# Altium PCB OpenMV Cam M7.PcbDoc
Units mil, origin at the board's own origin, x right, y up, seen from the top; angles counter-clockwise.
Board outline 1400 x 1750 mil, 4 copper layers (Top Layer, GND, VCC, Bottom Layer), stack 61.855 mil thick; 49 components, 68 nets, 293 pads, 153 vias.
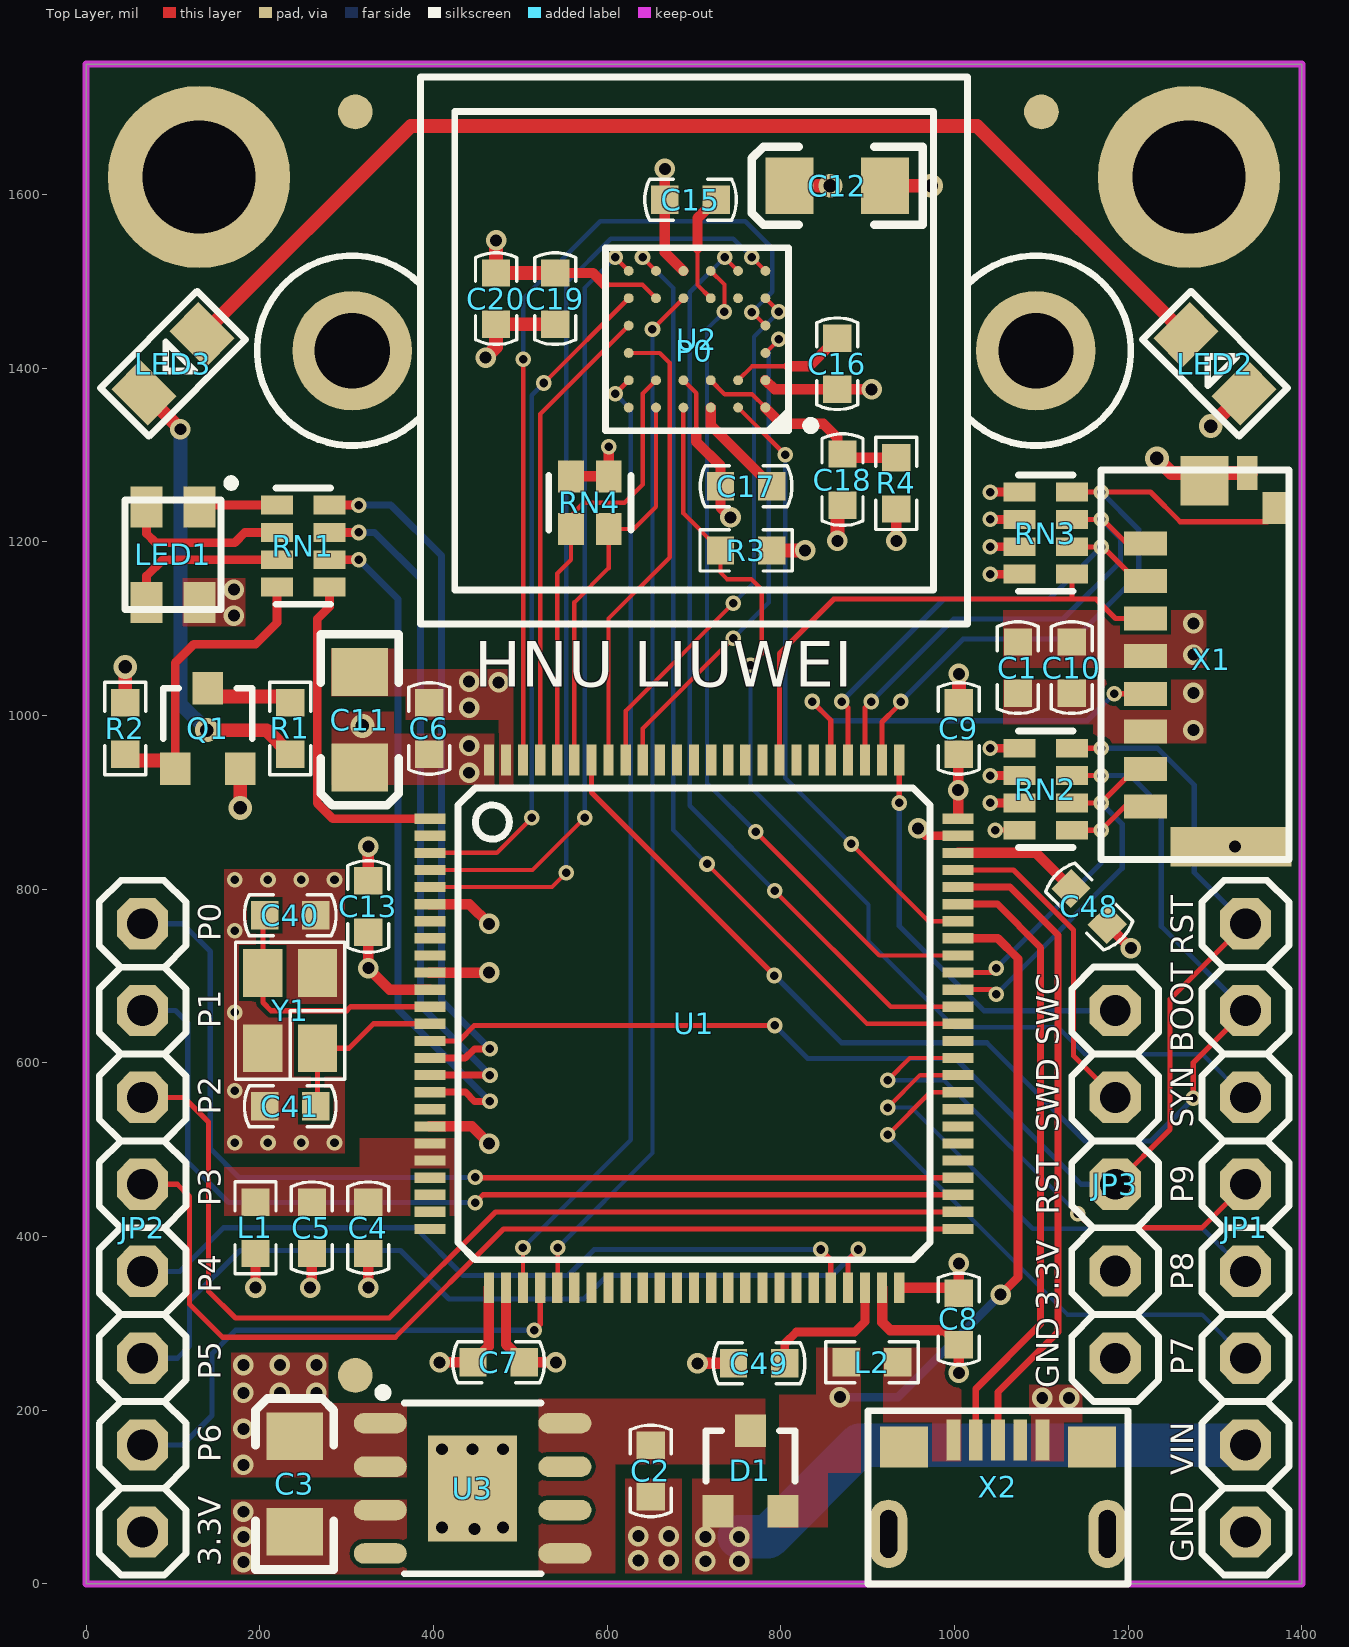
[diagram p0: Top Layer view]
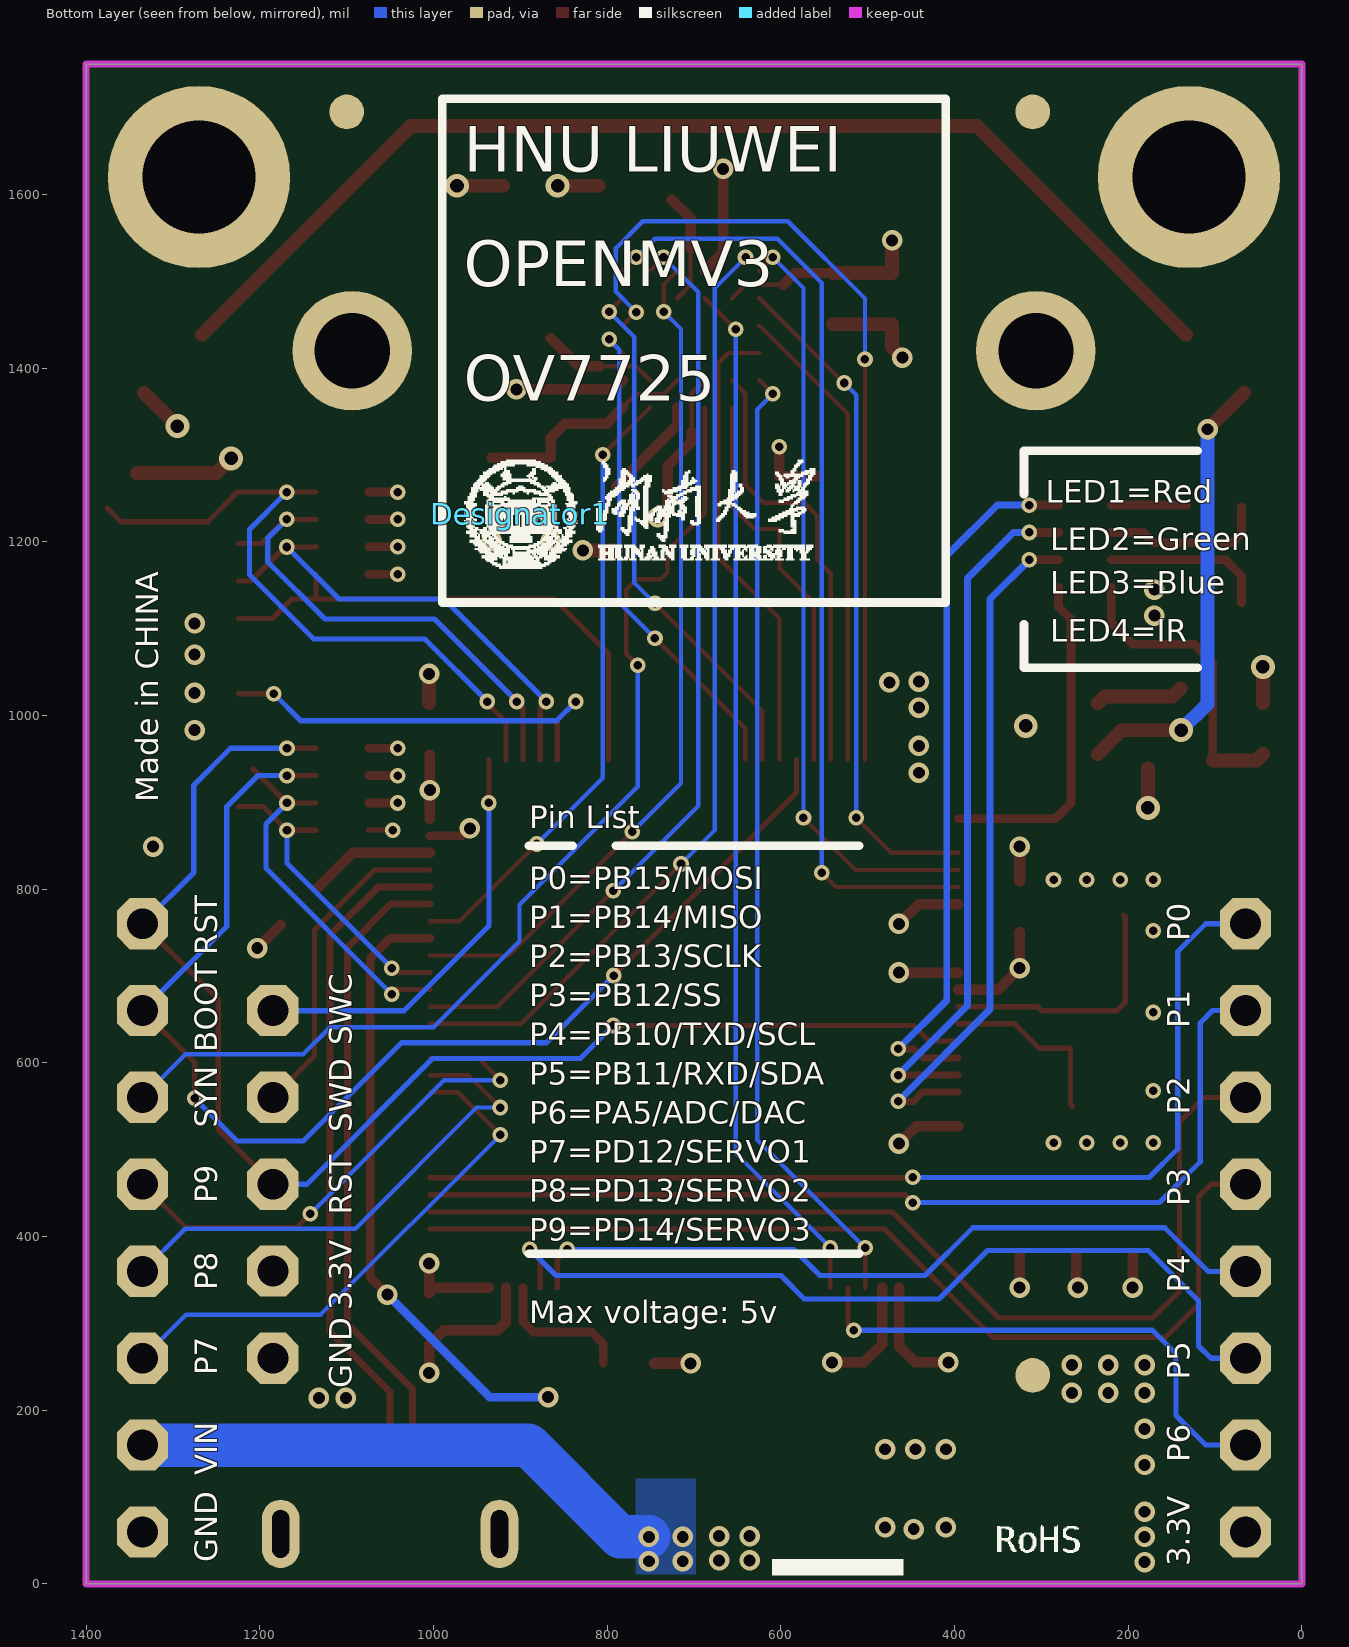
[diagram p1: Bottom Layer view, seen from below]
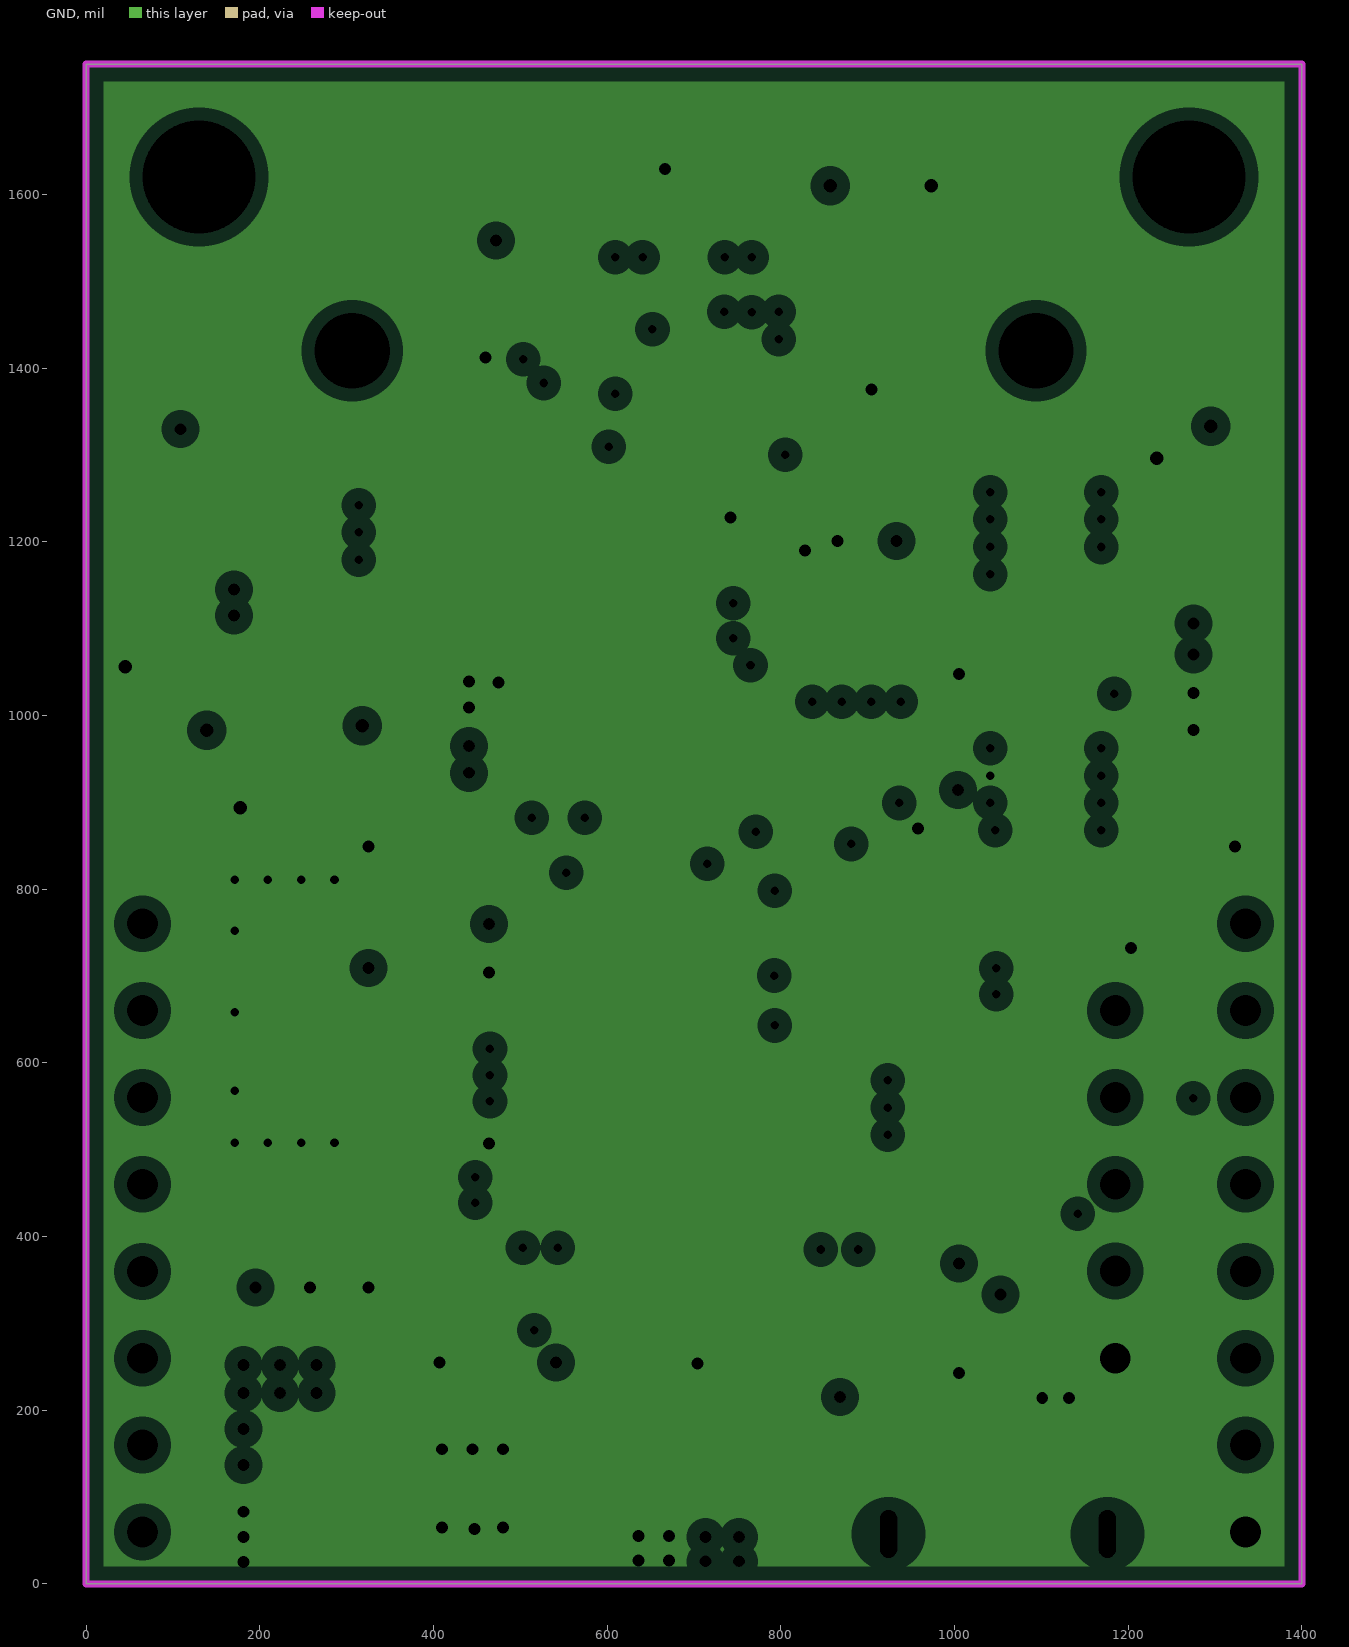
[diagram p2: GND, clearances drawn from the general rule]
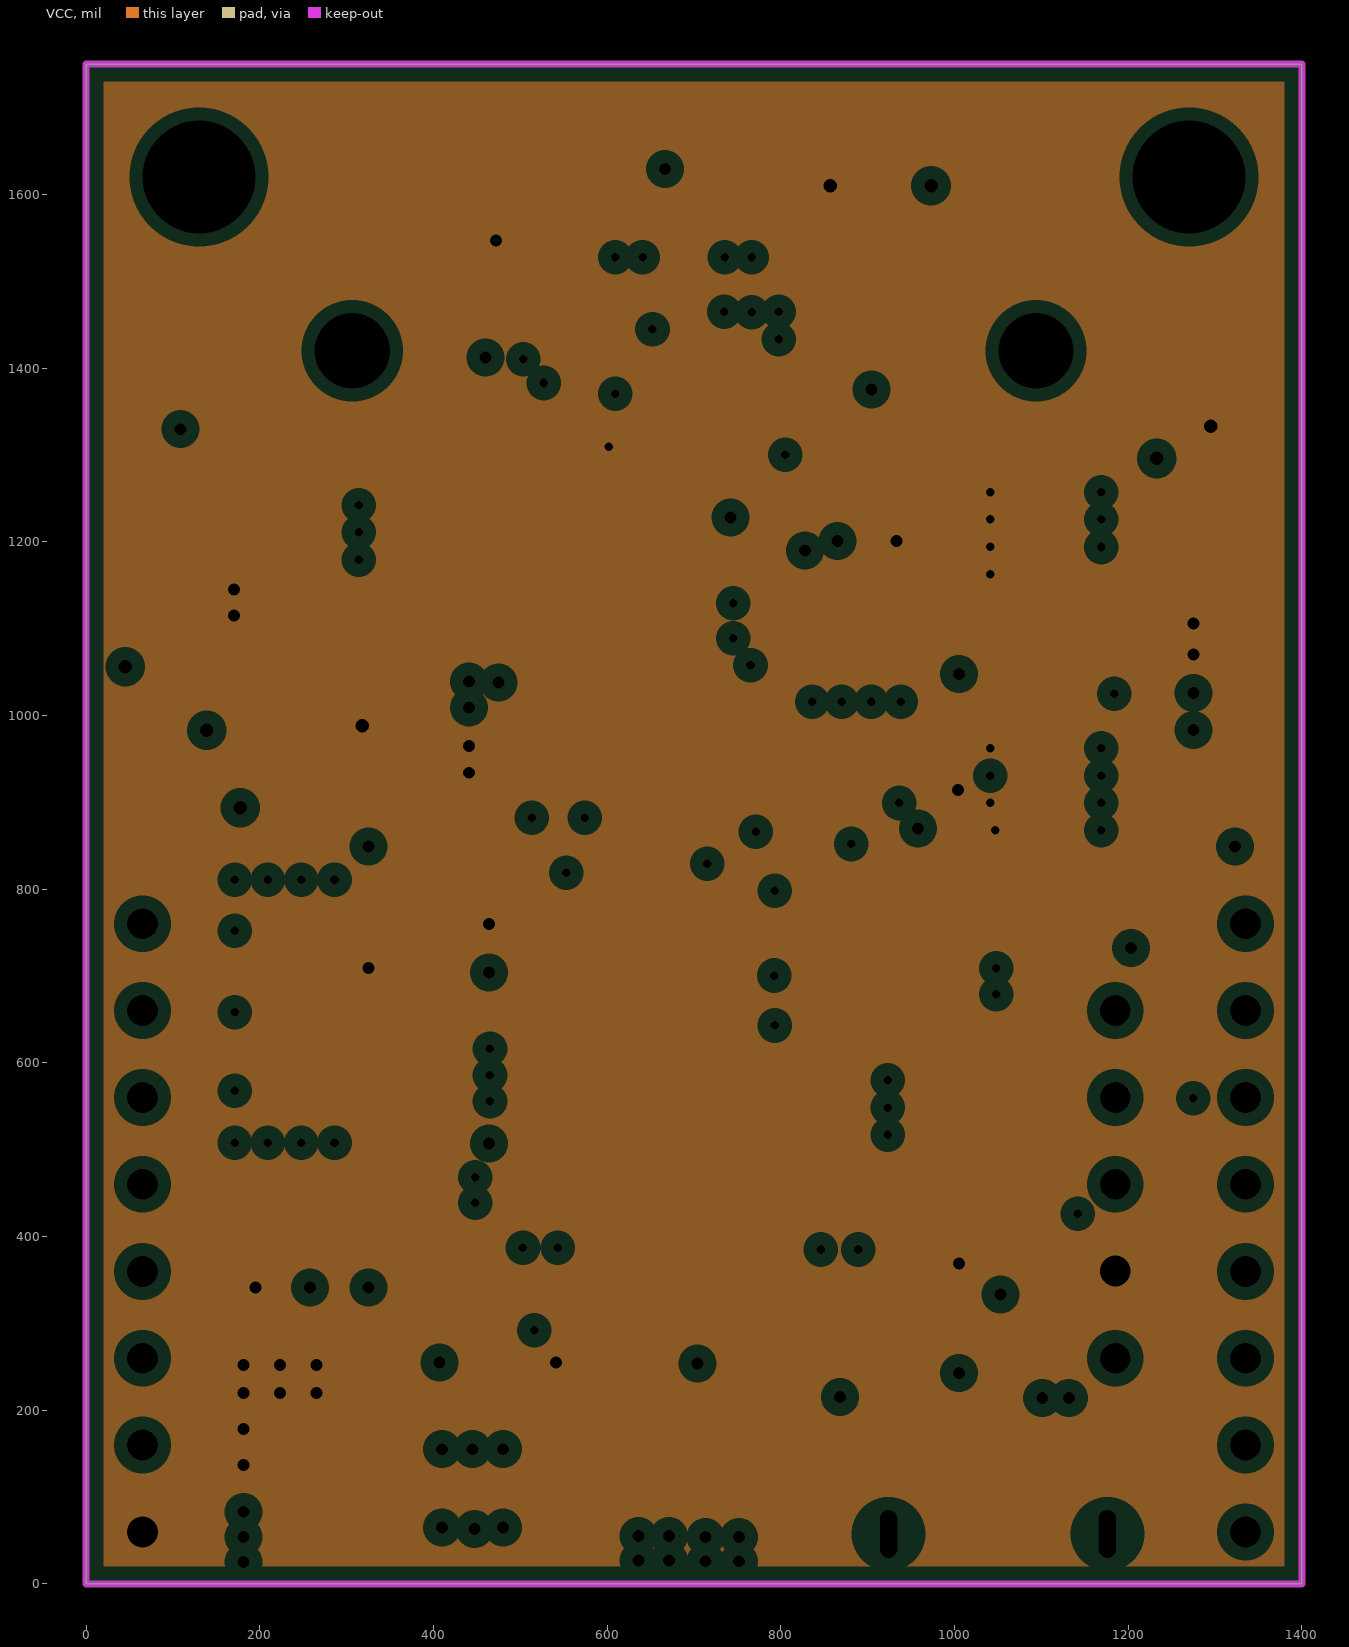
[diagram p3: VCC, clearances drawn from the general rule]
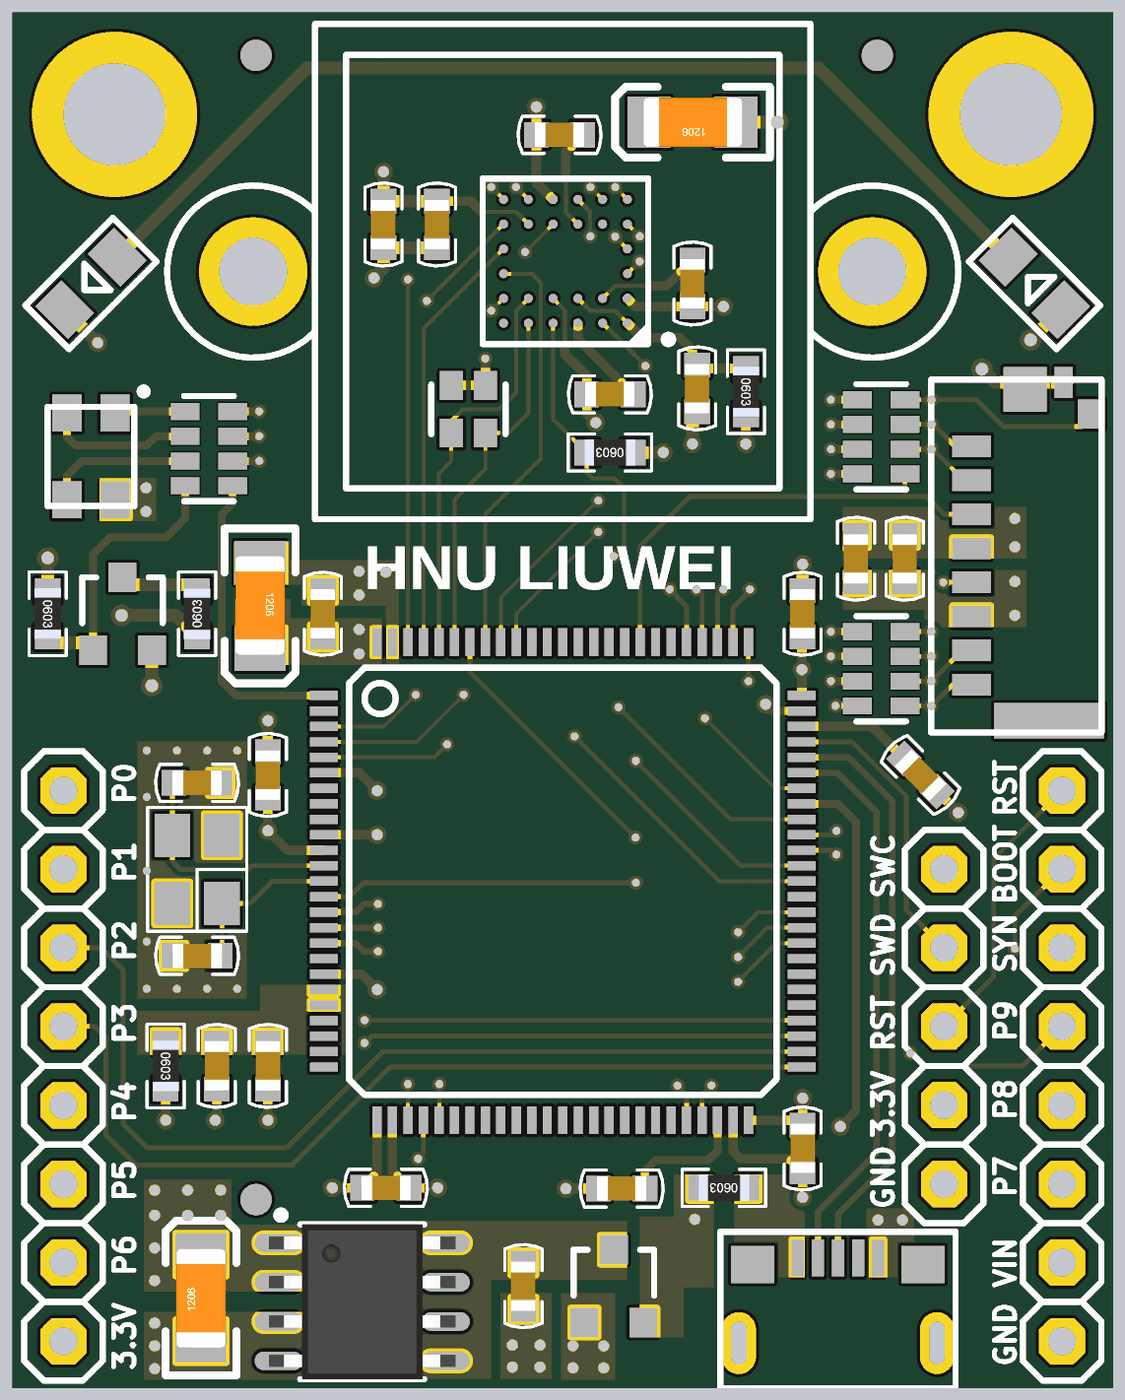
[diagram p4: 3D render of the assembled board from above, using the file's embedded part models]

## Layer stack, top to bottom
Top Solder: solder mask 0.4, Solder Resist, Dk 3.5
Top Layer: signal copper 1.4
Dielectric 1: prepreg 3.937, Dk 4.2
GND: plane copper 0.689, net GND
Dielectric 2: core 49.803, FR-4, Dk 4.2
VCC: plane copper 0.689, net VCC
Dielectric 3: prepreg 3.937, Dk 4.2
Bottom Layer: signal copper 1.4
Bottom Solder: solder mask 0.4, Solder Resist, Dk 3.5

## Board outline
0,0 1400,0 1400,1750 0,1750

## Design rules (kind name [scope] priority, off if disabled: settings)
Clearance [All] p1: gap=5 ignorepadtopadclearanceinfootprint=FALSE except(0: Arc-Hole Track-Hole SMDPad-Hole THPad-Hole Via-Hole Fill-Hole Poly-Hole Region-Hole Text-Hole)
ComponentClearance [All] p1: gap=5 collisioncheckmode=3 verticalgap=10 showdistances=FALSE
PlaneClearance [All] p1: clearance=15
PlaneConnect [All] p1: planeconnectstyle=Direct reliefexpansion=20 reliefentries=4 reliefconductorwidth=10 reliefairgap=10
PolygonConnect [All] p1: connectstyle=Direct reliefconductorwidth=10 reliefentries=4 polygonreliefangle="90 Angle" airgapwidth=10
RoutingVias [All] p1: holewidth=9.84 width=16 viastyle="Through Hole" minholewidth=7.87 minwidth=15.75 maxholewidth=118.11 maxwidth=196.85
SolderMaskExpansion [All] p1: expansion=4
Width [All] p1: maxlimit=100 minlimit=3.5 preferedwidth=10
27 further rules are at their usual default settings.

## Components (designator, comment, footprint, x,y, rotation, side; value= is the part's Value field where it differs from the comment)
C1 "CAP" C0603 1073,1055 r90 top
C2 "CAP" C0603 650,130 r90 top
C3 "CAP" CAP-A 240,115 r90 top locked
C4 "CAP" C0603 325,410 r270 top
C5 "CAP" C0603 260,410 r270 top
C6 "CAP" C0603 395,985 r90 top
C7 "CAP" C0603 475,255 r180 top
C8 "CAP" C0603 1005,305 r270 top
C9 "CAP" C0603 1005,985 r90 top
C10 "CAP" C0603 1135,1055 r90 top
C11 "CAP" CAP-A 315,995 r270 top
C12 "CAP" CAP-A 865,1610 r180 top locked
C13 "CAP" C0603 325,780 r90 top
C15 "CAP" C0603 696,1594 r0 top locked
C16 "CAP" C0603 865,1405 r90 top
C17 "CAP" C0603 760,1264 r0 top
C18 "CAP" C0603 871,1271.53 r90 top
C19 "CAP" C0603 540,1480 r90 top
C20 "CAP" C0603 472,1480 r90 top
C40 "CAP" C0603 235,770 r0 top
C41 "CAP" C0603 235,550 r180 top
C48 "CAP" C0603 1155,780 r135 top
C49 "CAP" C0603 775,254 r0 top
D1 "PMEG2005CT" SOT-23 765,130 r0 top
Designator1 "Comment" 湖南大学2 899.5,1232 r180 bottom
JP1 "HEADER1*8" HEADER1*8_oct 1335,410 r270 top
JP2 "HEADER1*8" HEADER1*8_oct 65,410 r270 top
JP3 "HEADER1*5" HEADER1*5_oct 1185,460 r270 top
L1 "Inductance" R0603 195,410 r270 top
L2 "Inductance" R0603 905,255 r180 top
LED1 "LED_RGB" LED_RGB_3528 100,1185 r90 top
LED2 "LED" LED1206 1300,1405 r315 top
LED3 "LED" LED1206 100,1405 r45 top
P0 "CameraLens" CAMLENS_M12-2016 700,1420.08 r180 top locked
Q1 "MOSFET" sot-23 140,985 r0 top
R1 "Resistor" R0603 235,985 r90 top
R2 "Resistor" R0603 45,985 r270 top
R3 "Resistor" R0603 760,1190 r180 top
R4 "Resistor" R0603 933,1267.33 r270 top
RN1 "Res" R0603_X4 250,1195 r270 top
RN2 "Res" R0603_X4 1105,915 r270 top
RN3 "Res" R0603_X4 1105,1210 r270 top
RN4 "Res" R0603_x2 580,1245 r0 top
U1 "STM32F765VIT6" LQFP100 700,644.88 r0 top locked
U2 "OV7725" BGA28C80P6X6_535X535X96 700,1420.08 r180 top locked
U3 "BD33IA" SOIC8-HS 445,110 r0 top locked
X1 "SD Card" SD_SLOT 1220,895 r90 top
X2 "USB" MicroUSB_5P_2h 1050,57.5 r0 top
Y1 "Crystal" XTAL-3225 235,660 r90 top

## Footprints (in the part's own frame and the unit in brackets; to place one, negate y for a bottom-side part, rotate by r counter-clockwise, add the part's x,y. Pads: shape width x height; smd on the part's side, far side on the other; paste and mask are expansions set on the pad)
BGA28C80P6X6_535X535X96 [mm] "BGA, 28-Leads, Body 5.35x5.35mmx0.96mm, Pitch 0.80mm"
  round 0.29 smd: A1(-2.089,1.666) A2(-1.289,1.666) A3(-0.489,1.666) A4(0.311,1.666) A5(1.111,1.666) A6(1.911,1.666) B1(-2.089,0.866) B2(-1.289,0.866) B3(-0.489,0.866) B4(0.311,0.866) B5(1.111,0.866) B6(1.911,0.866) C1(-2.089,0.066) C6(1.911,0.066) D1(-2.089,-0.734) D6(1.911,-0.734) E1(-2.089,-1.534) E2(-1.289,-1.534) E3(-0.489,-1.534) E4(0.311,-1.534) E5(1.111,-1.534) E6(1.911,-1.534) F1(-2.089,-2.334) F2(-1.289,-2.334) F3(-0.489,-2.334) F4(0.311,-2.334) F5(1.111,-2.334) F6(1.911,-2.334)
  silkscreen extent -3.54,-3.01 2.59,2.34, body extent -2.76,-3.01 2.59,2.34, height 0.97
C0603 [mm]
  rect 0.8x0.83 smd: 1(-0.75,0) 2(0.75,0)
  silkscreen extent -1.34,-0.6 1.34,0.6, body extent -0.81,-0.39 0.79,0.41, height 0.9
CAMLENS_M12-2016 [mm]
  round 3.5 hole 2.2: 1(-10,0) 2(10,0)
  silkscreen extent -12.78,-8 12.78,8
CAP-A [mil]
  rect 55x65 smd: 1(-55,0) 2(55,0)
  silkscreen extent -98,-45 98,45, body extent -63,-31 62,31, height 39
HEADER1*5_oct [mm]
  oct 1.5x1.5 hole 0.9: 1(-5.085,0) 2(-2.545,0) 3(-0.005,0) 4(2.535,0) 5(5.085,0)
  silkscreen extent -6.35,-1.27 6.35,1.27
HEADER1*8_oct [mm]
  oct 1.5x1.5 hole 0.9: 1(-8.895,0) 2(-6.355,0) 3(-3.815,0) 4(-1.275,0) 5(1.275,0) 6(3.815,0) 7(6.355,0) 8(8.895,0)
  silkscreen extent -10.16,-1.27 10.16,1.27
LED1206 [mm]
  rect 1.2x1.5 smd: 1(1.2,0) 2(-1.2,0)
  silkscreen extent -2,-1 2,1
LED_RGB_3528 [mm]
  rect 1.2x0.95 smd: 1(1.4,-0.775) 2(-1.4,-0.775) 3(-1.4,0.775) 4(1.4,0.775)
  silkscreen extent -1.6,-1.8 2.2,1.4
LQFP100 [mm] "LQFP100"
  rect 0.9x0.3 smd: 1(-7.72,6) 2(-7.72,5.5) 3(-7.72,5) 4(-7.72,4.5) 5(-7.72,4) 6(-7.72,3.5) 7(-7.72,3) 8(-7.72,2.5) 9(-7.72,2) 10(-7.72,1.5) 11(-7.72,1) 12(-7.72,0.5) 13(-7.72,0) 14(-7.72,-0.5) 15(-7.72,-1) 16(-7.72,-1.5) 17(-7.72,-2) 18(-7.72,-2.5) 19(-7.72,-3) 20(-7.72,-3.5) 21(-7.72,-4) 22(-7.72,-4.5) 23(-7.72,-5) 24(-7.72,-5.5) 25(-7.72,-6) 51(7.72,-6) 52(7.72,-5.5) 53(7.72,-5) 54(7.72,-4.5) 55(7.72,-4) 56(7.72,-3.5) 57(7.72,-3) 58(7.72,-2.5) 59(7.72,-2) 60(7.72,-1.5) 61(7.72,-1) 62(7.72,-0.5) 63(7.72,0) 64(7.72,0.5) 65(7.72,1) 66(7.72,1.5) 67(7.72,2) 68(7.72,2.5) 69(7.72,3) 70(7.72,3.5) 71(7.72,4) 72(7.72,4.5) 73(7.72,5) 74(7.72,5.5) 75(7.72,6)
  rect 0.3x0.9 smd: 26(-6,-7.72) 27(-5.5,-7.72) 28(-5,-7.72) 29(-4.5,-7.72) 30(-4,-7.72) 31(-3.5,-7.72) 32(-3,-7.72) 33(-2.5,-7.72) 34(-2,-7.72) 35(-1.5,-7.72) 36(-1,-7.72) 37(-0.5,-7.72) 38(0,-7.72) 39(0.5,-7.72) 40(1,-7.72) 41(1.5,-7.72) 42(2,-7.72) 43(2.5,-7.72) 44(3,-7.72) 45(3.5,-7.72) 46(4,-7.72) 47(4.5,-7.72) 48(5,-7.72) 49(5.5,-7.72) 50(6,-7.72) 76(6,7.72) 77(5.5,7.72) 78(5,7.72) 79(4.5,7.72) 80(4,7.72) 81(3.5,7.72) 82(3,7.72) 83(2.5,7.72) 84(2,7.72) 85(1.5,7.72) 86(1,7.72) 87(0.5,7.72) 88(0,7.72) 89(-0.5,7.72) 90(-1,7.72) 91(-1.5,7.72) 92(-2,7.72) 93(-2.5,7.72) 94(-3,7.72) 95(-3.5,7.72) 96(-4,7.72) 97(-4.5,7.72) 98(-5,7.72) 99(-5.5,7.72) 100(-6,7.72)
  silkscreen extent -6.9,-6.9 6.9,6.9
MicroUSB_5P_2h [mm]
  rect 0.4x1.2 smd: 1(-1.3,2.75) 2(-0.65,2.75) 3(0,2.75) 4(0.65,2.75) 5(1.3,2.75)
  rect 1.4x1.2 smd: 6(2.75,2.54) 9(-2.75,2.54)
  oval 1.1x2 hole 0.5 slot 1.4 at 90 deg: 7(3.2,0) 8(-3.2,0)
  silkscreen extent -3.8,-1.46 3.8,3.6
R0603 [mm]
  rect 0.8x0.83 smd: 1(-0.75,0) 2(0.75,0)
  silkscreen extent -1.35,-0.6 1.35,0.6, body extent -0.82,-0.42 0.82,0.43, height 0.45
R0603_x2 [mm]
  rect 0.75x0.93 smd: 1(-0.55,-0.77) 2(0.55,-0.77) 3(0.55,0.77) 4(-0.55,0.77)
  silkscreen extent -1.2,-0.8 1.2,0.8
R0603_X4 [mm]
  rect 0.55x0.93 smd mask+0.051: 1(-1.2,-0.77) 2(-0.4,-0.77) 3(0.4,-0.77) 4(1.2,-0.77) 5(1.2,0.77) 6(0.4,0.77) 7(-0.4,0.77) 8(-1.2,0.77)
  silkscreen extent -1.7,-0.8 1.7,0.8
SD_SLOT [mm]
  rect 0.7x1.25 smd: 1(7.7,0) 2(6.6,0) 3(5.5,0) 4(4.4,0) 5(3.3,0) 6(2.2,0) 7(1.1,0) 8(0,0)
  rect 0.95x0.85 smd: 9(8.735,-3.85)
  rect 1x0.6 smd: 10(9.76,-2.975)
  rect 1.45x1.4 smd: 11(9.535,-1.725)
  rect 1.15x3.55 smd: 12(-1.17,-2.5)
  silkscreen extent -1.55,-4.2 9.85,1.31
SOIC8-HS [mm] "SOIC, 8-Leads, Body 5.0x4.0mm (max), Pitch 1.27mm, IPC Medium Density"
  oval 1.55x0.6 smd: 1(-2.7,1.905) 2(-2.7,0.635) 3(-2.7,-0.635) 4(-2.7,-1.905) 5(2.7,-1.905) 6(2.7,-0.635) 7(2.7,0.635) 8(2.7,1.905)
  rect 2.6x3.1 smd: 9(0,0)
  silkscreen extent -2.75,-2.5 2,2.92, body extent -3.02,-2.51 3.02,2.51, height 1.6
SOT-23 [mm]
  rect 0.9x0.95 smd: 1(-0.95,-1.175) 2(0.95,-1.175) 3(0,1.175)
  silkscreen extent -1.3,-0.3 1.3,1.18
sot-23 [mm]
  rect 0.9x0.95 smd: 1(-0.95,-1.175) 2(0.95,-1.175) 3(0,1.175)
  silkscreen extent -1.3,-0.3 1.3,1.18
XTAL-3225 [mm]
  rect 1.4x1.15 smd: 1(-1.1,-0.8) 2(1.1,-0.8) 3(1.1,0.8) 4(-1.1,0.8)
  silkscreen extent -2,-1.6 2,1.6, body extent -1.8,-1.25 1.8,1.25
湖南大学2 [mil]
  silkscreen extent -65,-63 339,62

## Part data
C1 C2 C4 C5 C6 C7 C8 C9 C10 C13 C15 C16 C17 C18 C19 C20 C40 C41 C48 C49: library part C
C3 C11 C12: library part CAP-B
D1: library part D_Double
L1 L2: library part L
Q1: library part AO3402
R1 R2 R3 R4: library part R
RN1 RN2 RN3: library part RES-Pack4
RN4: library part RES-Pack2
X1: library part SD_Slot
Y1: library part 无源晶振

## Free pads (board coordinates)
  round 210 hole 129.92: 0(130,1620) 0(1270,1620)
  round 40 smd: 0(310,240) 0(310,1695) 0(1100,1695)
  round 40 smd far side: 0(310,240) 0(310,1695) 0(1100,1695)

## Via types
v1: diameter 17.99, hole 9.84, Top Layer to Bottom Layer, tented both sides, 78 vias
v2: diameter 23.62, hole 13.78, Top Layer to Bottom Layer, tented both sides, 67 vias
v3: diameter 27.56, hole 15.75, Top Layer to Bottom Layer, tented both sides, 8 vias

## Nets (pads, with @x,y where several pads share a name; then routed paths per layer and width w, separated by ;. In a path a pad name is that pad's centre, name@x,y a point inside that pad or via, vN(x,y) a via of type N, cw(c..) or ccw(c..) an arc to the next point about the centre after c; other vN are vias at no path point)
BOOT0: JP1.2 RN2.7 U1.94 | length 1436
  Top Layer w6: U1.94@581.89,949.02 581.89,911.11 v1(792.5,700.5) ; RN2.7 v1(1168.75,930.75) ; v1(1275,559) 1275,600.2 JP1.2
  Bottom Layer w6: v1(792.5,700.5) 870,623 1037,623 1150,510 1226,510 v1(1275,559) ; v1(1168.75,930.75) 1202.25,930.75 1238,895 1238,757.2 JP1.2
DAC: JP2.7 U1.29 | length 598.9
  Top Layer w6: v1(516,292) 522.83,298.83 U1.29@522.83,340.75
  Bottom Layer w6: JP2.7 110.8,159.8 145,194 145,265 172,292 v1(516,292)
DCMI_CLK: U1.67 U2.F3 | length 976.1
  Top Layer w5: U2.F3 735,1496.19 v1(735,1465) ; v1(771,866) 913.38,723.62 U1.67@1004.13,723.62
  Bottom Layer w5: v1(735,1465) 715,1445 715,922 v1(771,866)
DCMI_D0: U1.63 U2.F5 | length 1116.7
  Top Layer w5: v1(640.7,1527.5) U2.F5 ; v1(715,829) 899.12,644.88 U1.63 U1.63@1004.13,644.88
  Bottom Layer w5: v1(640.7,1527.5) 676,1492.19 676,868 v1(715,829)
DCMI_D1: U1.64 U2.F2 | length 1075.1
  Top Layer w5: v1(735.19,1527.5) U2.F2 ; v1(793,798) 926.43,664.57 U1.64@1004.13,664.57
  Bottom Layer w5: v1(735.19,1527.5) 695,1487.31 695,896 v1(793,798)
DCMI_D2: U1.97 U2.D6 | length 542.2
  Top Layer w5: U1.97@522.83,949.02 522.83,1347.05 U2.D6
DCMI_D3: U1.98 U2.D1 | length 972.8
  Top Layer w5: U1.98@503.15,949.02 v1(503.15,1410) ; v1(766.68,1464.5) U2.D1
  Bottom Layer w5: v1(503.15,1410) 503.15,1480.15 592,1569 759,1569 790,1538 790,1487.82 v1(766.68,1464.5)
DCMI_D4: U1.3 U2.E6 | length 778.6
  Top Layer w5: U1.3@395.87,841.73 472.73,841.73 v1(513,882) ; v1(527.14,1382.86) U2.E6
  Bottom Layer w5: v1(513,882) 513,1368.71 v1(527.14,1382.86)
DCMI_D5: U1.92 U2.E1 | length 611
  Top Layer w5: U1.92@621.26,949.02 621.26,1005.26 v1(745,1129) ; U2.E1 v1(797.77,1464.91)
  Bottom Layer w5: v1(745,1129) 769,1153 769,1436.15 v1(797.77,1464.91)
DCMI_D6: U1.4 U2.F6 | length 885
  Top Layer w5: U1.4@395.87,822.05 514.05,822.05 v1(574,882) ; v1(609.2,1527.5) U2.F6
  Bottom Layer w5: v1(574,882) 574,1492.3 v1(609.2,1527.5)
DCMI_D7: U1.5 U2.F1 | length 1108.7
  Top Layer w5: U1.5@395.87,802.36 536.36,802.36 v1(553,819) ; v1(766.68,1527.5) U2.F1
  Bottom Layer w5: v1(553,819) 553,1498 604,1549 745.18,1549 v1(766.68,1527.5)
DCMI_HSYNC: U1.28 U2.B6 | length 1110.6
  Top Layer w5: v1(503,387) 503,340.9 U1.28@503.15,340.75 ; v1(609.2,1370.43) U2.B6
  Bottom Layer w5: v1(503,387) 627.2,511.2 627.2,1352.43 v1(609.2,1370.43)
DCMI_PCLK: U1.30 U2.E4 | length 1204.1
  Top Layer w5: U1.30@542.52,340.75 543,341.23 v1(543,387) ; v1(652.14,1444.86) U2.E4
  Bottom Layer w5: v1(543,387) 652.14,496.14 v1@652.14,1441.86 ; v1@649.14,1444.86 v1@652.14,1441.86 ; v1(652.14,1444.86) v1@652.14,1441.86
DCMI_PWDN: U1.91 U2.C1 | length 570.9
  Top Layer w5: U1.91@640.94,949.02 640.94,984.94 v1(745,1089) ; U2.C1 v1(797.77,1433.01)
  Bottom Layer w5: v1(745,1089) 786,1130 786,1421.24 v1(797.77,1433.01)
DCMI_RST: U1.69 U2.A2 | length 716.4
  Top Layer w5: U2.A2 v1(805.1,1300.1) ; v1(881,852) 970.01,762.99 U1.69@1004.13,762.99
  Bottom Layer w5: v1(805.1,1300.1) 805.1,927.9 v1(881,852)
DCMI_VSYNC: U1.93 U2.C6 | length 538.2
  Top Layer w5: U1.93@601.57,949.02 601.57,1111.57 672,1182 672,1406 660.54,1417.46 U2.C6
FREX: U1.56
FS_DM: U1.70 X2.2 | length 713.6
  Top Layer w8: U1.70@1004.13,782.68 1049.32,782.68 1099,733 1099,299 1024.41,224.41 X2.2
FS_DP: U1.71 X2.3 | length 747.6
  Top Layer w8: U1.71@1004.13,802.36 1063.64,802.36 1119,747 1119,290 1050,221 X2.3
FSIN: JP1.3 R3.2 U2.A4 | length 1238.5
  Top Layer w5: U2.A4 687.74,1232.74 R3.2 730.47,1164.53 738,1157 766,1157 778,1145 778,1071 v1(765,1058)
  Bottom Layer w5: v1(765,1058) 765,918 901,782 901,740 1000,641 1119,641 1150,610 1285.2,610 JP1.3
FXPST: U1.55
GND: C1.1 C2.1 C3.1 C4.2 C5.2 C6.2 C7.2 C8.2 C9.2 C10.1 C11.1 C12.1 C13.2 C15.1 C16.1 C17.1 C18.1 C19.1 C20.1 C40.2 C41.2 C48.1 C49.1 JP1.8 JP3.5 Q1.2 R2.1 R3.1 RN2.2 U1.10 U1.19 U1.26 U1.49 U1.74 U1.99 U2.B1 U2.B4 U2.F4 U3.3 U3.9 X1.6 X1.10 X1.11 X1.12 X2.5 Y1.2 Y1.4 | length 1637.2
  Top Layer w5: U2.B4 702.74,1370.96 702.74,1326
  Top Layer w10: v2(958,870) 966.58,861.42 U1.74@1004.13,861.42 ; v1(1041,930.75) RN2.2
  Top Layer w12: v2@260,341 C5.2 ; v2(325,341) C4.2 ; U1.19@395.87,526.77 444.23,526.77 v2(464,507) ; U1.10@395.87,703.94 v2@464,703.94 ; v2(407,255) C7.2 463.78,273.31 U1.26@463.78,340.75 ; v2(666.47,1629.53) C15.1 666.47,1533.22 U2.F4 ; 702.74,1326 702.74,1315.26 730.47,1287.53 C17.1 730.47,1239.53 v2(742,1228) ; U2.B1 792.72,1375.47 C16.1 v2(904.47,1375.47) ; U1.49@916.54,340.75 916.54,301.46 926,292 988.47,292 C8.2 v2(1005,243) ; C48.1 v2(1203,732)
  Top Layer w13: C13.2 v2(325,849) ; v2(704,254) C49.1
  Top Layer w16: R2.1 v3(45,1056) ; v3(177.4,893.6) Q1.2 ; v2(460,1412) 472,1424 C20.1 C19.1 ; R3.1 v2(828,1190) ; v2(865,1201) C18.1@865,1237.47 ; C12.1 v3(973,1610) ; C9.2 v2(1005,1048) ; v3(1233,1296) 1249.75,1279.25 X1.10 X1.10@1341.54,1279.25
  other v1: 171,508 209.33,508 247.67,508 286,508 171,568 171,658 171,752 171,811 209.33,811 247.67,811 286,811
  other v2: 181,25 636,27 671,27 181,54 636,55 671,55 447,63 410,65 480,65 181,83 410,155 445,155 480,155 1101,214 1132,214 258,341 464,704 1322.83,848.94 1275,983 441,1009 1275,1026 475,1038 441,1039
I2C1_SCL: RN4.2 U1.95 U2.A5 | length 461.4
  Top Layer w5: U1.95@562.2,949.02 562.2,1130.2 601.65,1169.65 RN4.2 630.69,1214.69 656.24,1240.24 U2.A5
I2C1_SDA: RN4.1 U1.96 U2.B5 | length 511.6
  Top Layer w5: U1.96@542.52,949.02 542.52,1163.52 558.35,1179.35 RN4.1 558.35,1230.35 573,1245 620,1245 641,1266 641,1370.73 U2.B5
I2C2_SCL: JP2.5 U1.46 | length 886
  Top Layer w6: v1(846,385) 857.48,373.52 U1.46@857.48,340.75
  Bottom Layer w6: JP2.5 107.8,359.8 158,410 379,410 434,355 555,355 585,385 v1(846,385)
I2C2_SDA: JP2.6 U1.47 | length 1001.9
  Top Layer w6: U1.47@877.17,340.75 877.17,373.17 v1(889,385)
  Bottom Layer w6: JP2.6 104.8,259.8 119,274 119,326 177,384 362,384 418,328 573,328 600,355 859,355 v1(889,385)
LED_B: RN1.6 U1.17 | length 793.3
  Top Layer w8: U1.17@395.87,566.14 436.86,566.14 447.35,555.65 v1(465,555.65)
  Top Layer w10: RN1.6 v1(314,1179.25)
  Bottom Layer w8: v1(314,1179.25) 359,1134.25 359,661.65 v1(465,555.65)
LED_G: RN1.7 U1.16 | length 801
  Top Layer w8: U1.16@395.87,585.83 v1(465,585.83)
  Top Layer w10: RN1.7 v1(314,1210.75)
  Bottom Layer w8: v1(314,1210.75) 332.25,1210.75 385,1158 385,665.83 v1(465,585.83)
LED_IR: RN1.5 U1.1 | length 392
  Top Layer w10: RN1.5 280.32,1125.32 266,1111 266,899 283.9,881.1 U1.1@395.87,881.1
LED_R: RN1.8 U1.15 | length 817.5
  Top Layer w8: U1.15@395.87,605.51 U1.15 436.51,605.51 447,616 v1(465,616)
  Top Layer w10: RN1.8 v1(314,1242.24)
  Bottom Layer w8: v1(314,1242.24) 350.76,1242.24 409,1184 409,672 v1(465,616)
NetC4_1: C4.1 C5.1 L1.1 U1.20 U1.21
NetC15_2: C15.2 U2.E3 | length 128.8
  Top Layer w5: 704,1538 704,1495.69 U2.E3
  Top Layer w12: 704,1538 704,1572.47 C15.2
NetC16_2: C16.2 U2.B2 | length 134.4
  Top Layer w5: U2.B2 766.76,1402 809,1402
  Top Layer w12: 809,1402 832.47,1402 C16.2
NetC17_2: C17.2 U2.A3 | length 119.6
  Top Layer w12: U2.A3 719.23,1334.3 C17.2
NetC18_2: C18.2 R4.1 U2.A1 U2.B3 | length 264.7
  Top Layer w5: U2.B3 735.2,1370 766.7,1370 U2.A1
  Top Layer w12: U2.A1 800.7,1336 849,1336 865,1320 865,1296.53 865.33,1296.86 R4.1
NetC40_1: C40.1 U1.12 Y1.3 | length 299.5
  Top Layer w6: C40.1 203.5,768.03 Y1.3 203.5,669.5 213,660 300,660 304.57,664.57 U1.12@395.87,664.57
NetC41_1: C41.1 U1.13 Y1.1 | length 208.6
  Top Layer w6: C41.1 266.5,551.97 Y1.1 302.69,616.69 330.88,644.88 U1.13@395.87,644.88
NetC48_2: C48.2 U1.73 | length 146.9
  Top Layer w12: U1.73@1004.13,841.73 1093.27,841.73 C48.2
NetC49_2: C49.2 U1.48 | length 164.2
  Top Layer w10: C49.2 804.53,276.53 818,290 885,290 896.85,301.85 U1.48@896.85,340.75
NetL2_1: L2.1 X2.1
NetLED1_1: LED1.1 RN1.1 | length 87
  Top Layer w10: LED1.1@132.64,1242.24 RN1.1
NetLED1_3: LED1.3 RN1.3 | length 188.6
  Top Layer w10: LED1.3 69.49,1160.49 88.25,1179.25 RN1.3
NetLED1_4: LED1.4 RN1.2 | length 190
  Top Layer w10: LED1.4 69.49,1209.51 80,1199 171,1199 182.75,1210.75 RN1.2
NetLED2_2: LED2.2 LED3.1 | length 1332.5
  Top Layer w16: LED3.1 374,1679 1026,1679 LED2.2
NetLED3_2: LED3.2 R1.1 | length 526
  Top Layer w16: LED3.2 v2(108.59,1329.59) ; v3(139,983) 207.47,983 R1.1
  Bottom Layer w16: v2(108.59,1329.59) 108.59,1013.41 v3(139,983)
NetQ1_1: Q1.1 R2.2 RN1.4 | length 350.5
  Top Layer w10: Q1.1@102.6,948 102.6,1060.6 124,1082 195,1082 219.69,1106.69 RN1.4
  Top Layer w16: R2.2 52.47,948 Q1.1@102.6,948
NetQ1_3: Q1.3 R1.2 | length 101.9
  Top Layer w16: Q1.3 149.26,1022 227.53,1022 R1.2
NRST: JP1.1 JP3.3 RN2.8 U1.14 | length 1576.8
  Top Layer w6: U1.14@395.87,625.2 429.2,625.2 447,643 v1(793,643) ; RN2.8 v1(1168.75,962.24) ; JP3.3 1248,523.2 1248,673.2 JP1.1
  Bottom Layer w6: v1(793,643) 831,605 1001,605 1145.8,460.2 JP3.3 ; v1(1168.75,962.24) 1233.76,962.24 1276,920 1276,819.2 JP1.1
RAW: D1.1 JP1.7 | length 626.8
  Bottom Layer w50: v2(752,54) 785,54 890.8,159.8 JP1.7
  other v2: 713,26 752,26 713,54
SD_CD: RN3.8 U1.77 X1.9 | length 777.2
  Top Layer w6: U1.77@916.54,949.02 916.54,992.54 v1@934,1010 ; RN3.8 v1(1169,1257.24) 1225.76,1257.24 1260,1223 1360.09,1223 X1.9@1375.98,1238.9
  Bottom Layer w6: v1(938,1016) 1010,1088 1138,1088 1212,1162 1212,1214.24 v1(1169,1257.24)
SDIO_CLK: U1.80 X1.5 | length 486.2
  Top Layer w6: v1(836,1016) 857.48,994.52 U1.80@857.48,949.02 ; v1(1184,1024.92) X1.5 X1.5@1224.41,1024.92
  Bottom Layer w6: v1(836,1016) 858,994 1153.08,994 v1(1184,1024.92)
SDIO_CMD: RN3.5 U1.83 X1.3 | length 611.7
  Top Layer w6: U1.83@798.43,949.02 798.43,1071.43 861,1134 1163,1134 1185.46,1111.54 X1.3 X1.3@1224.41,1111.54 ; 1135.32,1134.69 RN3.5
SDIO_D0: RN2.6 U1.65 X1.7 | length 426.5
  Top Layer w6: U1.65@1004.13,684.25 1041.75,684.25 1048,678 v1(1048,679) ; RN2.6 v1(1168.75,899.25) X1.7@1207.8,938.31
  Bottom Layer w6: v1(1048,679) 1193,824 1193,875 v1(1168.75,899.25)
SDIO_D1: RN2.5 U1.66 X1.8 | length 355.1
  Top Layer w6: U1.66@1004.13,703.94 1042.94,703.94 v1(1048,709) ; RN2.5 v1(1168.75,867.76) 1195.99,895 X1.8 X1.8@1224.41,895
  Bottom Layer w6: v1(1048,709) 1168.75,829.75 v1(1168.75,867.76)
SDIO_D2: RN3.7 U1.78 X1.1 | length 582
  Top Layer w6: U1.78@896.85,949.02 896.85,1008.85 v1(904,1016) ; RN3.7 v1(1169,1225.75) 1170.75,1225.75 1198.35,1198.15 X1.1 X1.1@1224.41,1198.15
  Bottom Layer w6: v1(904,1016) 999,1111 1125,1111 1191,1177 1191,1203.75 v1(1169,1225.75)
SDIO_D3: RN3.6 U1.79 X1.2 | length 548.1
  Top Layer w6: v1(870,1016) 877.17,1008.83 U1.79@877.17,949.02 ; RN3.6 1135.57,1194 v1(1169,1194) 1171,1194 1210.16,1154.84 X1.2 X1.2@1224.41,1154.84
  Bottom Layer w6: v1(870,1016) 988,1134 1109,1134 v1(1169,1194)
SPI2_MISO: JP2.2 U1.53 | length 1128.2
  Top Layer w6: v1(448,439) 457.03,448.03 U1.53@1004.13,448.03
  Bottom Layer w6: JP2.2 102.8,660.2 117,646 117,486 164,439 v1(448,439)
SPI2_MOSI: JP2.1 U1.54 | length 1193.3
  Top Layer w6: v1(448,468) 448.28,467.72 U1.54@1004.13,467.72
  Bottom Layer w6: JP2.1 110.8,760.2 143,728 143,501 176,468 v1(448,468)
SPI2_NSS: JP2.4 U1.51 | length 1136.4
  Top Layer w6: JP2.4 104.8,460.2 119,446 119,322 157,284 356,284 480.66,408.66 U1.51@1004.13,408.66
SPI2_SCLK: JP2.3 U1.52 | length 1209.3
  Top Layer w6: JP2.3 112.8,560.2 141,532 141,337 172,306 349,306 471.35,428.35 U1.52@1004.13,428.35
SWCLK: JP3.1 U1.76 | length 480.6
  Top Layer w6: v1(936.22,899.22) U1.76@936.22,949.02
  Bottom Layer w6: v1(936.22,899.22) 936.22,757.78 1034,660 1184.81,660 JP3.1
SWDIO: JP3.2 U1.72 | length 374.2
  Top Layer w6: U1.72@1004.13,822.05 1067.95,822.05 1137,753 1137,608.2 JP3.2
TIM4_CH1: JP1.6 U1.59 | length 620
  Top Layer w5: v1(923,517) 972.14,566.14 U1.59@1004.13,566.14
  Bottom Layer w5: v1(923,517) 1130,310 1284.8,310 JP1.6
TIM4_CH2: JP1.5 U1.60 | length 586.8
  Top Layer w5: v1(923,548.5) 960.33,585.83 U1.60@1004.13,585.83
  Bottom Layer w5: v1(923,548.5) 950.5,548.5 1090,409 1285.8,409 JP1.5
TIM4_CH3: JP1.4 U1.61 | length 594.9
  Top Layer w5: v1(923,580) 948.51,605.51 U1.61 U1.61@1004.13,605.51
  Top Layer w6: v1(1142,426) 1158,410 1284.8,410 JP1.4
  Bottom Layer w5: v1(923,580) 988,580 v1(1142,426)
VBUS: D1.2 L2.2 U1.68 | length 707.7
  Top Layer w10: U1.68@1004.13,743.31 1049.69,743.31 1073,720 1073,353 v2(1053,333)
  Bottom Layer w10: v2(868,215) 935,215 v2(1053,333)
VCC: C1.2 C3.2 C6.1 C7.1 C8.1 C9.1 C10.2 C11.2 C12.2 C13.1 C19.2 C20.2 JP2.8 JP3.4 L1.2 LED1.2 LED2.1 R4.2 RN2.1 RN2.3 RN2.4 RN3.1 RN3.2 RN3.3 RN3.4 RN4.3 RN4.4 U1.6 U1.11 U1.27 U1.50 U1.75 U1.100 U2.E5 U3.1 U3.2 X1.4 | length 1229
  Top Layer w5: 597,1496 640.7,1496 U2.E5
  Top Layer w6: v1(1047,868) 1074.44,868 RN2.4
  Top Layer w10: v1(1041,899.25) RN2.3 ; v1(1041,962.24) RN2.1 ; v1(1041,1162.76) RN3.4 ; v1(1041,1194.25) RN3.3 ; v1(1041,1225.75) RN3.2 ; v1(1041,1257.24) RN3.1
  Top Layer w12: v2(195,341) L1.2 ; C13.1 v2(325,709) 349.75,684.25 U1.11@395.87,684.25 ; U1.6@395.87,782.68 441.32,782.68 v2(464,760) ; U1.27@483.46,340.75 483.46,276.06 C7.1 v2(541,255) ; C19.2 583.47,1509.53 597,1496 ; RN4.4 RN4.3 v1(601.65,1309.35) ; v2(933,1201) R4.2 ; U1.50@936.22,340.75 998.78,340.75 C8.1 v2(1005,369) ; U1.75@1004.13,881.1 v2(1004.13,914) C9.1@1004.13,954.61
  Top Layer w16: v2(472,1547) C20.2 C19.2 ; C12.2 v3(857,1610) ; v3(1295,1333.19) LED2.1
  other v2: 181,137 181,178.5 181,220 223,220 265,220 181,252 223,252 265,252 441,934 441,965 1275,1070 1275,1106 170,1115 170,1145
  other v3: 318,988
VIN: C2.2 D1.3 U3.5 U3.8
pads on no net: P0.1 P0.2 U1.2 U1.7 U1.8 U1.9 U1.18 U1.22 U1.23 U1.24 U1.25 U1.31 U1.32 U1.33 U1.34 U1.35 U1.36 U1.37 U1.38 U1.39 U1.40 U1.41 U1.42 U1.43 U1.44 U1.45 U1.57 U1.58 U1.62 U1.81 U1.82 U1.84 U1.85 U1.86 U1.87 U1.88 U1.89 U1.90 U2.A6 U2.E2 U3.4 U3.6 U3.7 X2.4 X2.6 X2.7 X2.8 X2.9

## Polygon pours and split planes (outlines as drawn)
VCC on Top Layer "Top Layer-No Net" (solid, pour order 30): 111,1158 111,1103 177,1103 183,1103 183,1158
GND on Top Layer "Top Layer-No Net" (solid, pour order 0): 369,97 167,97 167,39 167,11 369,11
VCC on Top Layer "Top Layer-No Net" (solid, pour order 2): 369,123 167,123 167,266 279,266 279,230 279,208 369,208
GND on Top Layer "Top Layer-No Net" (solid, pour order 4): 298,496 298,823 159,823 159,496
NetC4_1 on Top Layer "Top Layer-No Net" (solid, pour order 6): 159,424 159,480 311,480 315,480 315,507 315,513 372,513 424,513 424,424
GND on Top Layer "Top Layer-No Net" (solid, pour order 8): 1086,141 1086,229 1125,229 1147,229 1147,141
NetL2_1 on Top Layer "Top Layer-No Net" (solid, pour order 10): 918,272 918,141 1007,141 1008,141 1008,272
VBUS on Top Layer "Top Layer-No Net" (solid, pour order 12): 798,65 854,65 854,128 892,128 892,272 841,272 841,218 798,218
RAW on Top Layer "Top Layer-No Net" (solid, pour order 14): 698,121 767,121 767,11 698,11
GND on Top Layer "Top Layer-No Net" (solid, pour order 16): 686,121 621,121 621,11 621,12 686,12
VIN on Top Layer "Top Layer-No Net" (solid, pour order 18): 521,12 609,12 609,138 716,138 782,138 782,213 521,213
GND on Top Layer "Top Layer-No Net" (solid, pour order 20): 1056,990 1056,1041 1290,1041 1290,968 1185,968 1160,968 1160,990
VCC on Top Layer "Top Layer-No Net" (solid, pour order 22): 1290,1055 1056,1055 1056,1107 1056,1121 1290,1121
VCC on Top Layer "Top Layer-No Net" (solid, pour order 24): 470,920 283,920 283,1004 354,1004 354,978 354,979 470,979
GND on Top Layer "Top Layer-No Net" (solid, pour order 26): 475,920 492,920 492,1028 492,1053 354,1053 354,1077 282,1077 282,1022 368,1022 368,995 475,995
RAW on Bottom Layer "Top Layer-No Net" (solid, pour order 28): 698,121 767,121 767,11 698,11
GND on GND (split plane): 1379.9,20.1 20.1,20.1 20.1,1729.9 1379.9,1729.9
VCC on VCC (split plane): 1379.9,20.1 20.1,20.1 20.1,1729.9 1379.9,1729.9

## Keep-outs
Keep-Out Layer:
  the board outline again, w7.87

## Silkscreen, mask and mechanical layers (free items; w line width, h text height)
Top Overlay:
  text "HNU LIUWEI" at 447,1016 h90
  text "P0" at 155,740 h26 r90
  text "RST" at 1275,724 h26 r90
  text "P1" at 155,640 h26 r90
  text "SWC" at 1120,620 h26 r90
  text "BOOT" at 1275,612 h26 r90
  text "P2" at 155,540 h26 r90
  text "SYN" at 1275,525 h26 r90
  text "SWD" at 1120,520 h26 r90
  text "P9" at 1275,438 h26 r90
  text "P3" at 155,435 h26 r90
  text "RST" at 1120,425 h26 r90
  text "P8" at 1275,338 h26 r90
  text "P4" at 155,335 h26 r90
  text "3.3V" at 1120,315 h26 r90
  text "P7" at 1275,240 h26 r90
  text "P5" at 155,235 h26 r90
  text "GND" at 1120,225 h26 r90
  text "P6" at 155,140 h26 r90
  text "VIN" at 1275,125 h26 r90
  text "GND" at 1275,25 h26 r90
  text "3.3V" at 155,20 h26 r90
Bottom Overlay:
  drawing of 314 lines, arcs and shapes, not listed
  text "HNU LIUWEI" at 965,1609 h90
  text "OPENMV3" at 965,1477.19 h90
  text "OV7725" at 965,1345.39 h90
  text "LED1=Red" at 295,1245 h26
  text "LED2=Green" at 290,1190 h26
  text "LED3=Blue" at 290,1140 h26
  text "LED4=IR" at 290,1085 h26
  text "Made in CHINA" at 1317,900 h26 r270
  text "Pin List" at 890,870 h26
  text "P0=PB15/MOSI" at 890,800 h26
  text "P1=PB14/MISO" at 890,755 h26
  text "P0" at 129,740 h26 r270
  text "RST" at 1249,724 h26 r270
  text "P2=PB13/SCLK" at 890,710 h26
  text "P3=PB12/SS" at 890,665 h26
  text "P1" at 129,640 h26 r270
  text "P4=PB10/TXD/SCL" at 890,620 h26
  text "SWC" at 1094,620 h26 r270
  text "BOOT" at 1249,612 h26 r270
  text "P5=PB11/RXD/SDA" at 890,575 h26
  text "P2" at 129,540 h26 r270
  text "P6=PA5/ADC/DAC" at 890,530 h26
  text "SYN" at 1249,525 h26 r270
  text "SWD" at 1094,520 h26 r270
  text "P7=PD12/SERVO1" at 890,485 h26
  text "P8=PD13/SERVO2" at 890,440 h26
  text "P9" at 1249,438 h26 r270
  text "P3" at 129,435 h26 r270
  text "RST" at 1094,425 h26 r270
  text "P9=PD14/SERVO3" at 890,395 h26
  text "P8" at 1249,338 h26 r270
  text "P4" at 129,335 h26 r270
  text "3.3V" at 1094,315 h26 r270
  text "Max voltage: 5v" at 890,300 h26
  text "P7" at 1249,240 h26 r270
  text "P5" at 129,235 h26 r270
  text "GND" at 1094,225 h26 r270
  text "P6" at 129,140 h26 r270
  text "VIN" at 1249,125 h26 r270
  text "GND" at 1249,25 h26 r270
  text "3.3V" at 129,20 h26 r270